# Altium PCB PCB1.PcbDoc
Units mm, origin at the board's own origin, x right, y up, seen from the top; angles counter-clockwise.
Board outline 37.59 x 16.89 mm, 2 copper layers (Top Layer, Bottom Layer); 10 components, 9 nets, 32 pads, 0 vias.
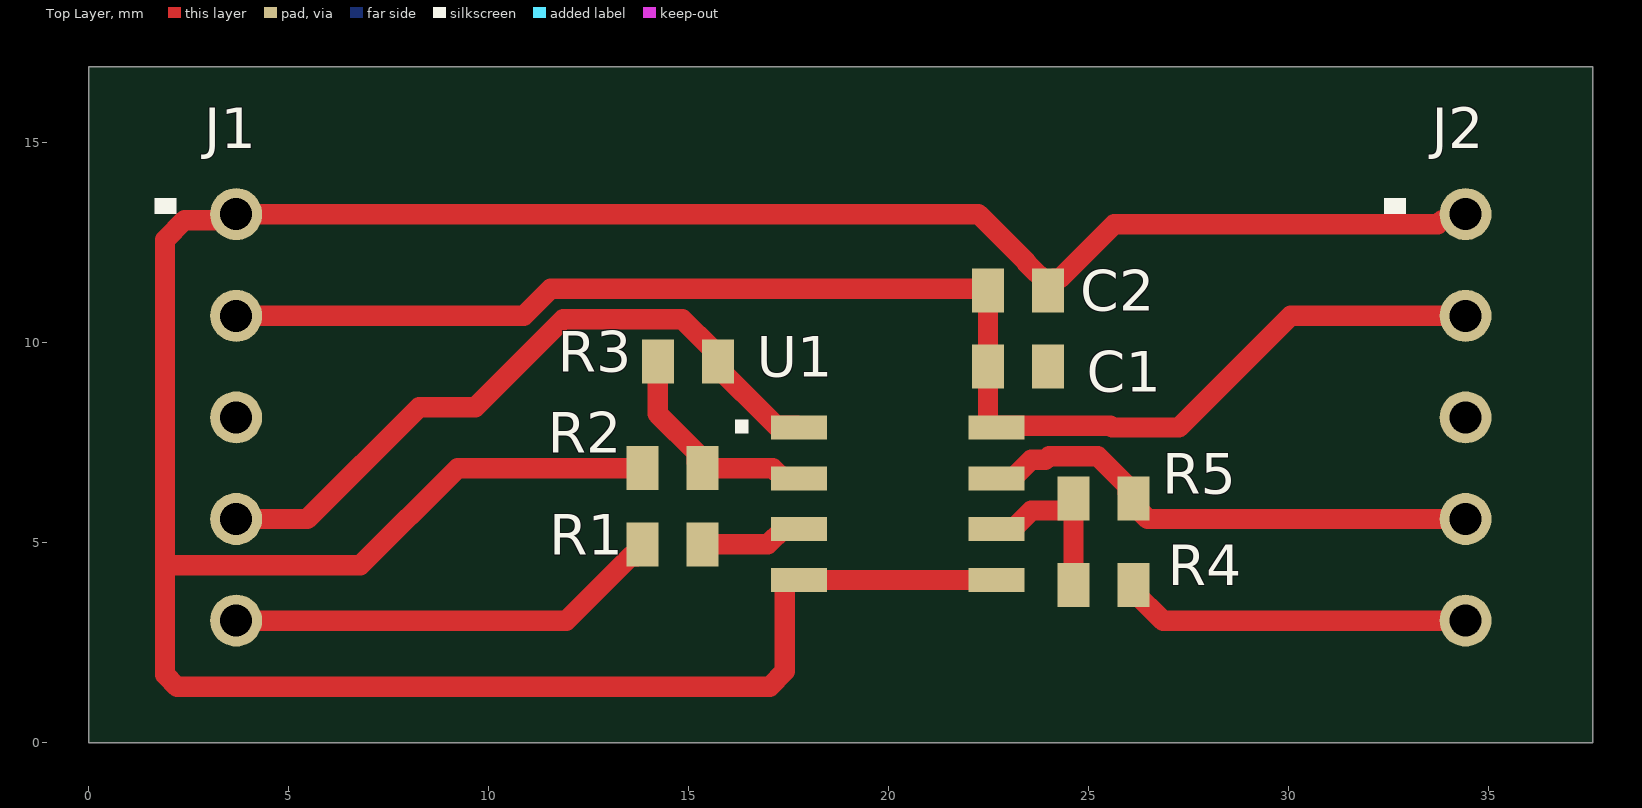
[diagram p0: Top Layer view]
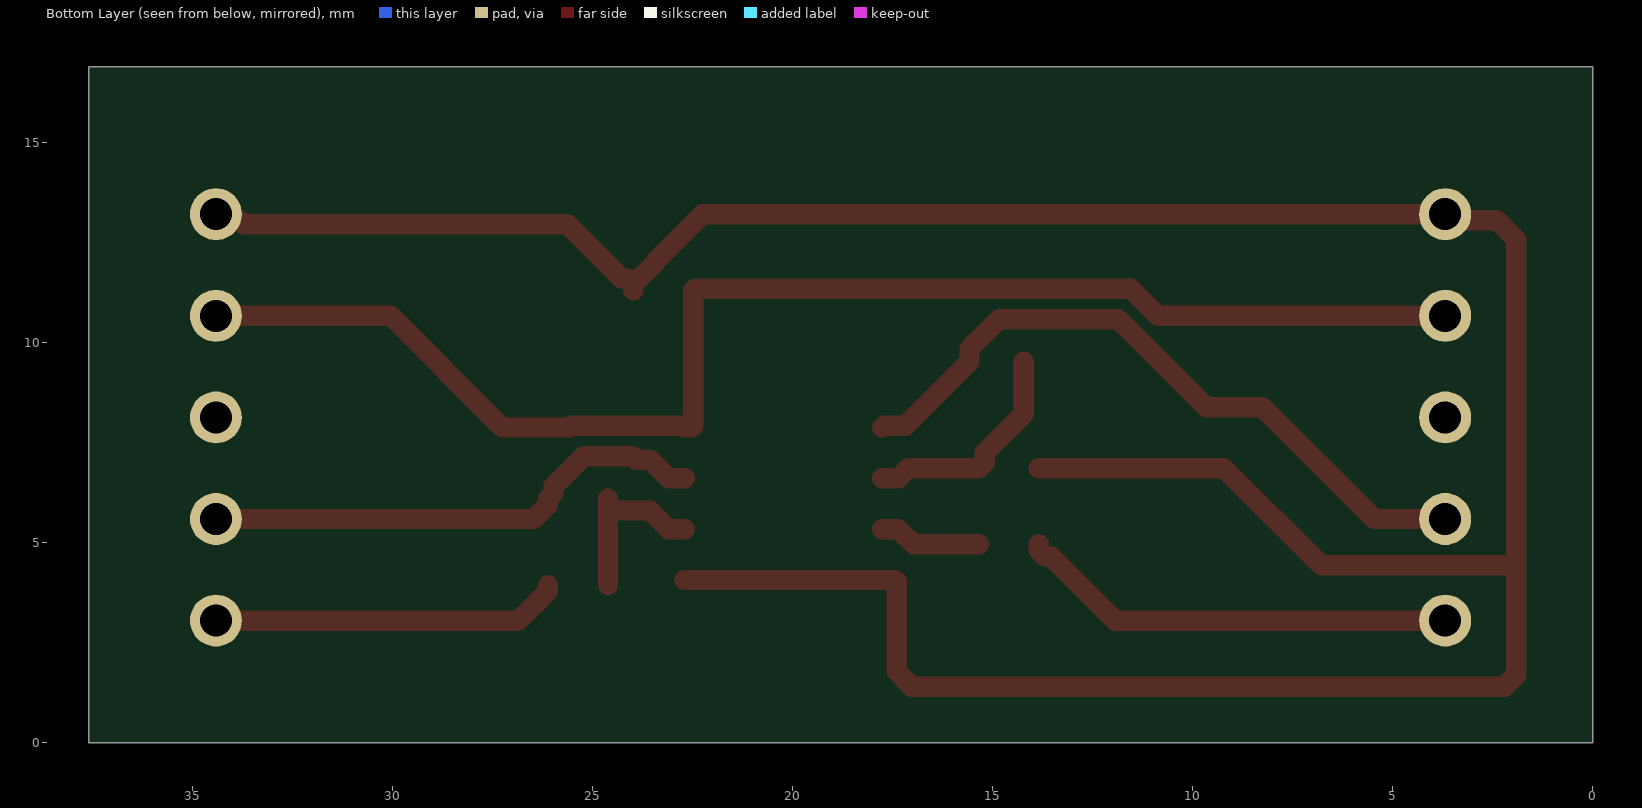
[diagram p1: Bottom Layer view, seen from below]
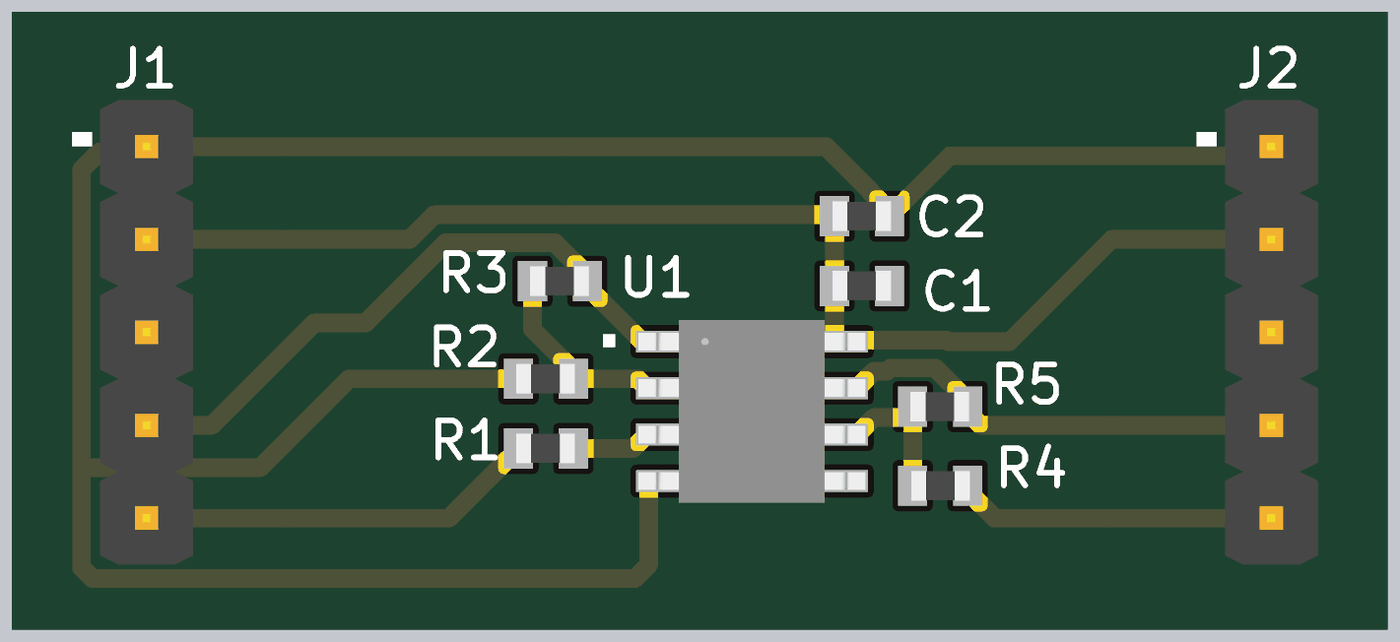
[diagram p2: 3D render of the assembled board from above, using the file's embedded part models]

## Layer stack, top to bottom
Top Solder: solder mask 0.0102, Solder Resist, Dk 3.5
Top Layer: signal copper 0.0356
Dielectric 1: dielectric 0.32, FR-4, Dk 4.8
Bottom Layer: signal copper 0.0356
Bottom Solder: solder mask 0.0102, Solder Resist, Dk 3.5

## Board outline
0,0 37.592,0 37.592,16.891 0,16.891

## Design rules (kind name [scope] priority, off if disabled: settings)
Clearance [All] p1: gap=0.254 ignorepadtopadclearanceinfootprint=FALSE
PolygonConnect [All] p1: connectstyle=Relief reliefconductorwidth=0.254 reliefentries=4 polygonreliefangle="90 Angle" airgapwidth=0.254
RoutingVias [All] p1: holewidth=0.711 width=1.27 viastyle="Through Hole" minholewidth=0.711 minwidth=1.27 maxholewidth=0.711 maxwidth=1.27
SolderMaskExpansion [All] p1: expansion=0.102 istentingtop=FALSE
SupplyNets "Schematic Supply Nets" [InNet('GND')] p1: voltage=0.000
Width [All] p1: maxlimit=25.4 minlimit=0.254 preferedwidth=0.635
30 further rules are at their usual default settings.

## Components (designator, comment, footprint, x,y, rotation, side; value= is the part's Value field where it differs from the comment)
C1 "1u 25V" 0603 26.979,12.398 r0 top value=1uF
C2 "0.1u 25V" 0603 26.979,14.303 r0 top value=100nF
J1 "61300511121" HEADER-5PIN 8.763,18.288 r0 top
J2 "61300511121" HEADER-5PIN 39.497,18.288 r0 top
R1 "10K 0.01W 0603" 0603 18.343,7.953 r0 top value=10kR
R2 "10K 0.01W 0603" 0603 18.343,9.858 r0 top value=10kR
R3 "10K 0.01W 0603" 0603 18.724,12.525 r0 top value=10kR
R4 "10K 0.01W 0603" 0603 21.614,0.937 r180 top value=10kR
R5 "10K 0.01W 0603" 0603 29.114,9.096 r0 top value=10kR
U1 "LM358DT" 8SOIC 27.636,11.684 r0 top

## Footprints (in the part's own frame and the unit in brackets; to place one, negate y for a bottom-side part, rotate by r counter-clockwise, add the part's x,y. Pads: shape width x height; smd on the part's side, far side on the other; paste and mask are expansions set on the pad)
8SOIC [mm]
  rect 1.4x0.6 smd mask+0.152: 1(-9.88,-3.81) 2(-9.88,-5.08) 3(-9.88,-6.35) 4(-9.88,-7.62) 5(-4.94,-7.62) 6(-4.94,-6.35) 7(-4.94,-5.08) 8(-4.94,-3.81)
  silkscreen extent -11.48,-3.96 -11.15,-3.61, body extent -10.52,-8.22 -4.32,-3.21, height 1.76
0603 [mm]
  rect 0.8x1.1 smd mask+0.152: 1(-4.5,-3) 2(-3,-3)
  body extent -4.56,-3.4 -2.96,-2.59, height 0.71
HEADER-5PIN [mm]
  round 1.3 hole 0.8 mask+0.152: 1(-5.08,-5.08) 2(-5.08,-7.62) 3(-5.08,-10.16) 4(-5.08,-12.7) 5(-5.08,-15.24)
  silkscreen extent -7.12,-5.07 -6.58,-4.67, body extent -6.35,-16.51 -3.81,-3.81, height 8.57

## Part data
C1: library part CC0603KRX5R8BB105, "Ceramic Capacitor, Multilayer, Ceramic, 25V, 10% +Tol, 10% -Tol, X5R, 15% TC, 1uF, Surface Mount, 0603", Capacitor Type=Ceramic, Case/Package=0603, Manufacturer=Yageo, Max Operating Temperature=85°C, Min Operating Temperature=-55°C, Package Shape=Rectangular, Package Style=SMTMeter, Rated DC Voltage (URdc)=25V, Supplier Part Number=311-1445-1-ND, Temperature Characteristics Code=X5R, Tolerance  (fill in as +-)=10%, Category="Ceramic Capacitors", ComponentLink1Description=https://datasheet.ciiva.com:443/pdfs/VipMasterIC/IC/YAGO/YAGO-S-A0006851646/YAGO-S-A0006851646-1.pdf?src-supplier=IHS+Markit, ComponentLink1URL=https://datasheet.ciiva.com:443/pdfs/VipMasterIC/IC/YAGO/YAGO-S-A0006851646/YAGO-S-A0006851646-1.pdf?src-supplier=IHS+Markit, ComponentLink2Description=https://datasheet.ciiva.com/176/mlccorderingcode-176785.pdf?src-supplier=Digikey, ComponentLink2URL=https://datasheet.ciiva.com/176/mlccorderingcode-176785.pdf?src-supplier=Digikey, ComponentLink3Description=https://datasheet.ciiva.com/176/mlccorderingcode-176786.pdf?src-supplier=Digikey, ComponentLink3URL=https://datasheet.ciiva.com/176/mlccorderingcode-176786.pdf?src-supplier=Digikey, ComponentLink4Description=https://datasheet.ciiva.com/176/mlccorderingcode-176787.pdf?src-supplier=Digikey, ComponentLink4URL=https://datasheet.ciiva.com/176/mlccorderingcode-176787.pdf?src-supplier=Digikey, ComponentLink5Description=https://datasheet.ciiva.com/11586/upy-gphc-x5r-4v-to-50v-12-11586318.pdf?src-supplier=Avnet, ComponentLink5URL=https://datasheet.ciiva.com/11586/upy-gphc-x5r-4v-to-50v-12-11586318.pdf?src-supplier=Avnet, ComponentLink6Description=https://datasheet.ciiva.com/7978/1525783-7978171.pdf?src-supplier=Element14, ComponentLink6URL=https://datasheet.ciiva.com/7978/1525783-7978171.pdf?src-supplier=Element14, Dielectric Material=Ceramic, Height=0.8mm, JESD-609 Code=e3, Length=1.6mm, Manufacturer Part Number=CC0603KRX5R8BB105, Mounting Technology="Surface Mount", Multilayer=Yes, Packaging="Tape and Reel", Pins=2, Pricing="1=0.1, 10=0.049, 50=0.0294, 100=0.0231, 500=0.01706, 1000=0.01413 (USD)", Reach SVHC Compliant=Yes, RoHS=Yes, RoHS Compliant=Yes, Stock=2233965, Supplier=Digikey, Terminal Finish=Nickel, Termination=Wraparound, Tolerance (fill in as +-)=10%, Width=0.8mm
C2: library part CC0603KRX7R8BB104, "Ceramic Capacitor, Multilayer, Ceramic, 25V, 10% +Tol, 10% -Tol, X7R, 15% TC, 0.1uF, Surface Mount, 0603", Capacitor Type=Ceramic, Case/Package=0603, Manufacturer=Yageo, Max Operating Temperature=125°C, Min Operating Temperature=-55°C, Package Shape=Rectangular, Package Style=SMTMeter, Rated DC Voltage (URdc)=25V, Supplier Part Number=311-1341-1-ND, Temperature Characteristics Code=X7R, Tolerance  (fill in as +-)=10%, Category="Ceramic Capacitors", ComponentLink1Description=https://datasheet.ciiva.com:443/pdfs/VipMasterIC/IC/YAGO/YAGO-S-A0003557223/YAGO-S-A0003557223-1.pdf?src-supplier=IHS+Markit, ComponentLink1URL=https://datasheet.ciiva.com:443/pdfs/VipMasterIC/IC/YAGO/YAGO-S-A0003557223/YAGO-S-A0003557223-1.pdf?src-supplier=IHS+Markit, ComponentLink2Description=https://datasheet.ciiva.com/11786/0900766b80c10176-11786120.pdf?src-supplier=Rs, ComponentLink2URL=https://datasheet.ciiva.com/11786/0900766b80c10176-11786120.pdf?src-supplier=Rs, ComponentLink3Description=https://datasheet.ciiva.com/144/mlccorderingcode-144075.pdf?src-supplier=Digikey, ComponentLink3URL=https://datasheet.ciiva.com/144/mlccorderingcode-144075.pdf?src-supplier=Digikey, ComponentLink4Description=https://datasheet.ciiva.com/7978/1489800-7978155.pdf?src-supplier=Element14, ComponentLink4URL=https://datasheet.ciiva.com/7978/1489800-7978155.pdf?src-supplier=Element14, ComponentLink5Description=https://datasheet.ciiva.com/28450/1489800-28450584.pdf?src-supplier=Element14, ComponentLink5URL=https://datasheet.ciiva.com/28450/1489800-28450584.pdf?src-supplier=Element14, ComponentLink6Description=https://datasheet.ciiva.com/13389/upy-gphc-x7r-6-3v-to-50v-8-13389352.pdf?src-supplier=Mouser, ComponentLink6URL=https://datasheet.ciiva.com/13389/upy-gphc-x7r-6-3v-to-50v-8-13389352.pdf?src-supplier=Mouser, ComponentLink7Description=https://datasheet.ciiva.com/144/mlccorderingcode-144073.pdf?src-supplier=Digikey, ComponentLink7URL=https://datasheet.ciiva.com/144/mlccorderingcode-144073.pdf?src-supplier=Digikey, ComponentLink8Description=https://datasheet.ciiva.com/144/mlccorderingcode-144074.pdf?src-supplier=Digikey, ComponentLink8URL=https://datasheet.ciiva.com/144/mlccorderingcode-144074.pdf?src-supplier=Digikey, ComponentLink9Description=https://datasheet.ciiva.com/11587/upy-gphc-x7r-6-3v-to-50v-8-11587208.pdf?src-supplier=Avnet, ComponentLink9URL=https://datasheet.ciiva.com/11587/upy-gphc-x7r-6-3v-to-50v-8-11587208.pdf?src-supplier=Avnet, ComponentLink10Description=https://datasheet.ciiva.com/26829/getdatasheetpartid-403577-26829431.pdf?src-supplier=Verical, ComponentLink10URL=https://datasheet.ciiva.com/26829/getdatasheetpartid-403577-26829431.pdf?src-supplier=Verical, Dielectric Material=Ceramic, Height=0.8mm, JESD-609 Code=e3, Length=1.6mm, Manufacturer Part Number=CC0603KRX7R8BB104, Mounting Technology="Surface Mount", Multilayer=Yes, Packaging="Tape and Reel", Pins=2, Pricing="1=0.1, 10=0.035, 50=0.0236, 100=0.0202, 500=0.01438, 1000=0.01259 (USD)", Reach SVHC Compliant=Yes, RoHS=Yes, RoHS Compliant=Yes, Stock=2626535, Supplier=Digikey, Terminal Finish=Nickel, Termination=Wraparound, Tolerance (fill in as +-)=10%, Width=0.8mm
J1 J2: "Board Connector, 5 Contact(s), 1 Row(s), Male, Straight, 0.1 inch Pitch, Solder Terminal, Locking, Black Insulator, Plug", Contact Resistance=20mR, Dielectric Withstanding Voltage (AC)=500V, Insulation Color=Black, Insulation Resistance=1GR, Manufacturer="Wurth Electronics", Max Operating Temperature=125°C, Min Operating Temperature=-40°C, Rated Current (Signal)=3A, Supplier Part Number=732-5318-ND, Body Breadth=0.1inch, Body Depth=0.1inch, Body Length=0.5inch, Body/Shell Style=PLUG, Category="Headers and Wire Housings", ComponentLink1Description=https://datasheet.ciiva.com:443/pdfs/VipMasterIC/IC/MIDC/MIDCS07676/MIDCS07676-1.pdf?src-supplier=IHS+Markit, ComponentLink1URL=https://datasheet.ciiva.com:443/pdfs/VipMasterIC/IC/MIDC/MIDCS07676/MIDCS07676-1.pdf?src-supplier=IHS+Markit, ComponentLink2Description=https://katalog.we-online.de/em/datasheet/6130xx11121.pdf?src-supplier=Digikey, ComponentLink2URL=https://katalog.we-online.de/em/datasheet/6130xx11121.pdf?src-supplier=Digikey, ComponentLink3Description=https://datasheet.octopart.com/61300511121-W%C3%BCrth-Elektronik-datasheet-21154836.pdf?src-supplier=Element14, ComponentLink3URL=https://datasheet.octopart.com/61300511121-W%C3%BCrth-Elektronik-datasheet-21154836.pdf?src-supplier=Element14, ComponentLink4Description=http://www.farnell.com/cad/1737268.pdf?src-supplier=Element14, ComponentLink4URL=http://www.farnell.com/cad/1737268.pdf?src-supplier=Element14, Connector Type="BOARD CONNECTOR", Contact Finish - Mating=GOLD, Contact Finish - Termination="Gold (Au) - with Nickel (Ni) barrier", Contact Gender=Male, Contact Material="Copper Alloy", Contact Pattern=RECTANGULAR, Contact Style="SQ PIN-SKT", Insulation Material=Polybutylene, JESD-609 Code=e4, Manufacturer Part Number=61300511121, Mating Contact Pitch=0.1inch, Mounting Option 1=LOCKING, Mounting Style=STRAIGHT, Mounting Technology=Board, Number Of Connectors=1, Number of Contacts=5, Number of Rows Loaded=1, PCB Contact Pattern=RECTANGULAR, Pricing="1=0.26, 10=0.222, 25=0.1852, 50=0.155, 100=0.141, 1000=0.128 (USD)", Reach SVHC Compliant=Yes, Reference Standard=UL, Reliability=COMMERCIAL, RoHS=Yes, RoHS Compliant=Yes, Stock=34461, Supplier=Digikey, Terminal Length=0.118inch, Terminal Pitch=2.54mm, Termination=Solder
R1 R2 R3 R4 R5: library part RC0603FR-0710KL, "Fixed Resistor, Metal Glaze/thick Film, 0.1W, 10000ohm, 75V, 1% +/-Tol, 100ppm/Cel, Surface Mount, 0603", Case/Package=0603, Manufacturer=Yageo, Max Operating Temperature=155°C, Min Operating Temperature=-55°C, Package Height=0.45mm, Package Length=1.6mm, Package Shape=Rectangular, Package Width=0.8mm, Power=100mW, Rated Temperature=70°C, Resistor Type="FIXED RESISTOR", Supplier Part Number=4023214, Temperature Coefficient=100ppm/°C, Tolerance=1%, Working Voltage=75V, Additional Feature="LASER TRIMMABLE", Category="Chip SMD Resistors", ComponentLink1Description=https://datasheet.ciiva.com:443/pdfs/VipMasterIC/IC/YAGO/YAGO-S-A0008145938/YAGO-S-A0008145938-1.pdf?src-supplier=IHS+Markit, ComponentLink1URL=https://datasheet.ciiva.com:443/pdfs/VipMasterIC/IC/YAGO/YAGO-S-A0008145938/YAGO-S-A0008145938-1.pdf?src-supplier=IHS+Markit, ComponentLink2Description=https://datasheet.ciiva.com/22747/443971-22747519.pdf?src-supplier=Element14, ComponentLink2URL=https://datasheet.ciiva.com/22747/443971-22747519.pdf?src-supplier=Element14, ComponentLink3Description=https://datasheet.ciiva.com/46440/1868787-46440891.pdf?src-supplier=Element14, ComponentLink3URL=https://datasheet.ciiva.com/46440/1868787-46440891.pdf?src-supplier=Element14, ComponentLink4Description=https://datasheet.ciiva.com/15189/getdatasheetpartid-409289-15189591.pdf?src-supplier=Verical, ComponentLink4URL=https://datasheet.ciiva.com/15189/getdatasheetpartid-409289-15189591.pdf?src-supplier=Verical, ComponentLink5Description=https://datasheet.ciiva.com/7660/38590-7660789.pdf?src-supplier=Element14, ComponentLink5URL=https://datasheet.ciiva.com/7660/38590-7660789.pdf?src-supplier=Element14, ComponentLink6Description=https://datasheet.ciiva.com/7746/1738695-7746239.pdf?src-supplier=Element14, ComponentLink6URL=https://datasheet.ciiva.com/7746/1738695-7746239.pdf?src-supplier=Element14, ComponentLink7Description=https://datasheet.ciiva.com/7983/443971-7983596.pdf?src-supplier=Element14, ComponentLink7URL=https://datasheet.ciiva.com/7983/443971-7983596.pdf?src-supplier=Element14, Construction=Chip, JESD-609 Code=e3, Manufacturer Part Number=RC0603FR-0710KL, Mounting Technology="Surface Mount", Packaging="Tape and Reel", Pins=2, Pricing="5000=0.0019, 50000=0.0018, 150000=0.0018, 375000=0.0017, 1000000=0.0016 (USD)", Reach SVHC Compliant=Yes, RoHS=Yes, RoHS Compliant=Yes, Stock=22010000, Supplier="Future Electronics", Technology="METAL GLAZE/THICK FILM", Terminal Finish=Nickel, Termination=Wraparound
U1: "Operational Amplifier, 2 Func, 9000uV Offset-Max, BIPolar, PDSO8", Average Bias Current-Max (IIB)=200nA, Bias Current-Max (IIB) @25C=150nA, Case/Package=SOP, Frequency Compensation=YES, Input Offset Voltage-Max=9mV, Manufacturer=STMicroelectronics, Max Operating Temperature=70°C, Max Supply Current=2mA, Min Operating Temperature=0°C, Nominal Supply Voltage=5V, Package Body Material=Plastic, Package Equivalence Code=SOP8,.25, Package Shape=Rectangular, Package Style="SMALL OUTLINEMeter", Peak Reflow Temperature (Cel)=260°C, Power Supplies=+-1.5/+-15/3/30V, Supplier Part Number=67T1304, Supply Voltage Limit-Max=32V, Temperature Grade=COMMERCIAL, Time @ Peak Reflow Temperature-Max (s)=30s, Voltage Gain-Min=25000, Amplifier Type="OPERATIONAL AMPLIFIER", Architecture=VOLTAGE-FEEDBACK, Category="Amplifiers - Op Amps, Buffer, Instrumentation", Channels=2, Common-mode Reject Ratio-Nom=60dB, ComponentLink1Description=https://datasheet.ciiva.com:443/pdfs/VipMasterIC/IC/SGST/SGST-S-A0004496881/SGST-S-A0004496881-1.pdf?src-supplier=IHS+Markit, ComponentLink1URL=https://datasheet.ciiva.com:443/pdfs/VipMasterIC/IC/SGST/SGST-S-A0004496881/SGST-S-A0004496881-1.pdf?src-supplier=IHS+Markit, Height - Seated (Max)=1.75mm, JESD-30 Code=R-PDSO-G8, JESD-609 Code=e4, Length=4.9mm, Low-Offset=No, Manufacturer Part Number=LM358DT, Moisture Sensitivity Level=1, Packaging="Tape and Reel", Pins=8, Pricing="1=0.405, 10=0.281, 25=0.234, 50=0.188, 100=0.141 (USD)", Qualification Status="Not Qualified", Reach SVHC Compliant=Yes, RoHS=Yes, RoHS Compliant=Yes, Slew Rate=0.6V/µs, Slew Rate-Min=0.3V/µs, Stock=440, Supplier=Avnet, Surface Mount=Yes, Technology=BIPOLAR, Terminal Finish=Nickel, Terminal Form="Gull Wing", Terminal Pitch=1.27mm, Terminal Position=DUAL, Unity Gain BW-Nom=1.1MHz, Width=3.9mm

## Nets (pads, with @x,y where several pads share a name; then routed paths per layer and width w, separated by ;. In a path a pad name is that pad's centre, name@x,y a point inside that pad or via, vN(x,y) a via of type N, cw(c..) or ccw(c..) an arc to the next point about the centre after c; other vN are vias at no path point)
GND: C2.2 J1.1 J2.1 R2.1 U1.4 U1.5 | length 81.5
  Top Layer w0.508: R2.1 9.216,6.858 6.788,4.43 1.92,4.43 1.905,4.445 ; U1.5 U1.4 17.445,4.064 17.399,4.018 17.399,1.778 17.018,1.397 2.203,1.397 1.905,1.695 1.905,4.445 ; C2.2 C2.2@23.979,11.453 ; J2.1 34.265,13.056 33.826,13.056 33.723,12.954 25.63,12.954 24.275,11.599 24.125,11.599 C2.2@23.979,11.453 ; 1.905,4.445 1.905,12.573 2.388,13.056 3.531,13.056 J1.1 22.242,13.208 23.449,12.002 23.449,11.983 C2.2@23.979,11.453
NetC1_1: C1.1 C2.1 J1.2 J2.2 U1.8 | length 35.6
  Top Layer w0.508: J1.2 10.871,10.668 11.548,11.345 22.437,11.345 C2.1 C1.1 22.479,7.92 22.525,7.874 U1.8 22.738,7.916 25.54,7.916 25.582,7.874 27.252,7.874 30.046,10.668 J2.2
NetJ1_4: J1.4 R3.2 U1.1 | length 17.5
  Top Layer w0.508: J1.4 5.461,5.588 8.255,8.382 9.662,8.382 11.863,10.583 14.834,10.583 15.578,9.839 15.578,9.521 17.179,7.92 17.71,7.92 U1.1
NetJ1_5: J1.5 R1.1 | length 11
  Top Layer w0.508: J1.5 11.938,3.048 13.547,4.657 13.697,4.657 13.843,4.803 R1.1
NetJ2_4: J2.4 R5.2 U1.7 | length 12.8
  Top Layer w0.508: U1.7 23.096,6.604 23.558,7.066 23.916,7.066 24.004,7.154 25.224,7.154 25.968,6.41 25.968,6.242 R5.2 26.114,5.946 26.472,5.588 J2.4
NetJ2_5: J2.5 R4.1 | length 8.8
  Top Layer w0.508: R4.1 26.114,3.787 26.853,3.048 J2.5
NetR1_2: R1.2 U1.3 | length 2.6
  Top Layer w0.508: R1.2 16.975,4.953 17.356,5.334 U1.3
NetR2_2: R2.2 R3.1 U1.2 | length 5.6
  Top Layer w0.508: R3.1 14.224,8.213 15.197,7.24 15.197,7.004 R2.2 17.102,6.858 17.356,6.604 U1.2
NetR4_2: R4.2 R5.1 U1.6 | length 4.3
  Top Layer w0.508: U1.6 23.096,5.334 23.562,5.8 24.468,5.8 R5.1@24.614,5.946 ; R4.2 R5.1@24.614,5.946 ; R5.1 R5.1@24.614,5.946
pads on no net: C1.2 J1.3 J2.3